# Allegro board AAST_BOARD V1.brd
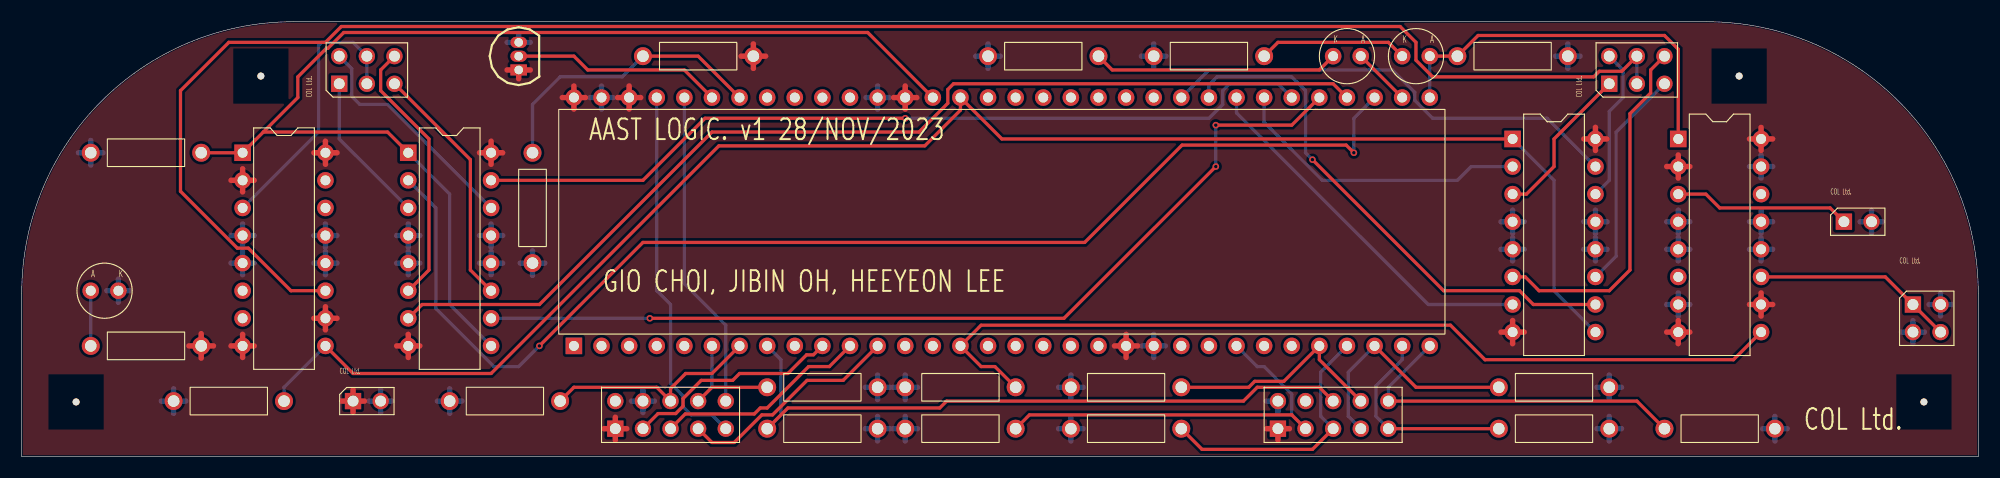
[diagram p0: board, top side]
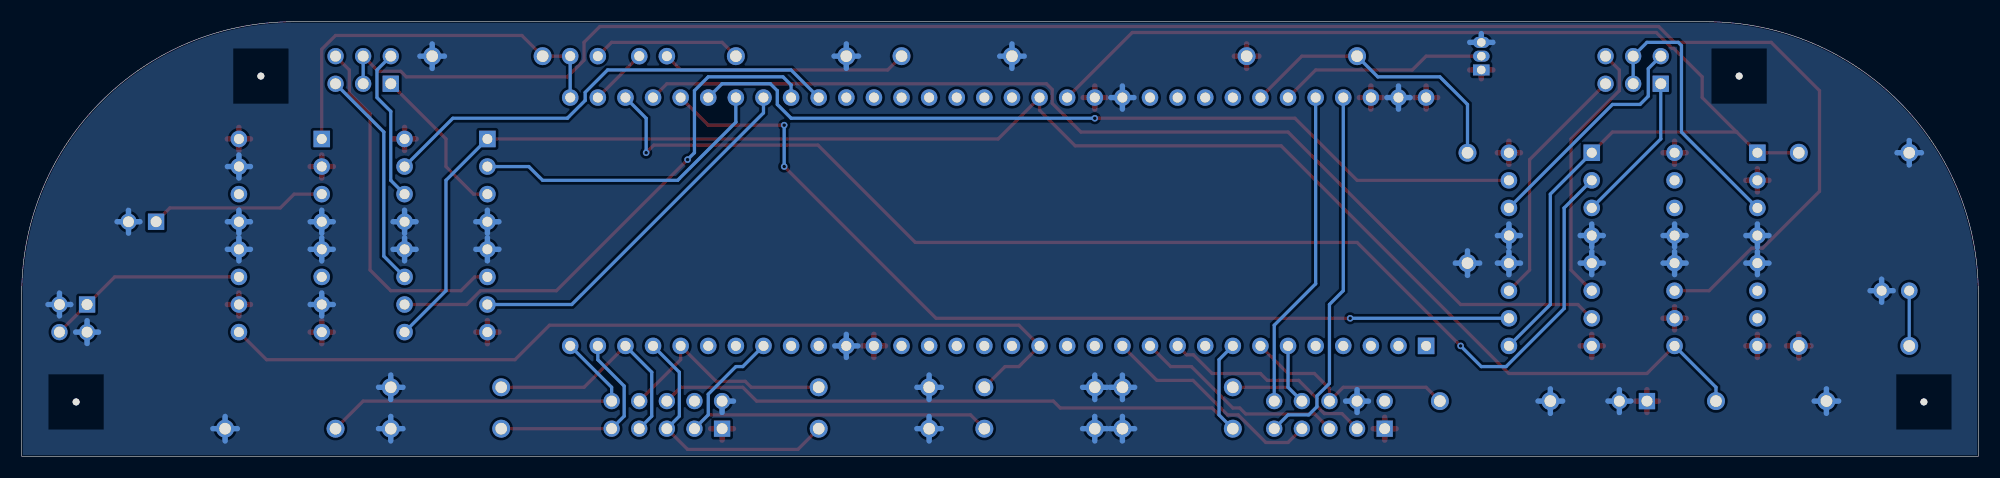
[diagram p1: board, bottom side, seen from below]

Outline 180 x 40 mm; copper layers: TOP, BOTTOM. Coordinates in mm from the lower left corner of the outline.
Outline path: 0,15 0,0 180,0 180,15 arc(172.68,32.68) 155,40 25,40 arc(7.32,32.68) 0,15

## Design rules (mm)
constraint set DEFAULT: min track width 0.3
nets with their own width: min track width 0.5; nets +5V GND

## Placement (name value [footprint] x y rotation side)
D1  LED  [COLLED]  120.65 36.83 270 top
D2  LED  [COLLED]  127 36.83 270 top
D3  LED  [COLLED]  8.89 15.24 90 top
J1  XMOTOR  [COLHEADER6]  31.75 35.56 90 top
J2  R_A_TRANSMIT  [COLHEADER10]  120.65 3.81 90 top
J3  YMOTOR  [COLHEADER6]  148.59 35.56 90 top
J4  CONTROLER_TRANSMIT  [COLHEADER10]  59.69 3.81 90 top
J5  GUN  [COLHEADER2]  168.91 21.59 0 top
J6  FANCON  [COLHEADER4]  175.26 12.7 0 top
J7  POWERCON  [COLHEADER2]  31.75 5.08 0 top
NOREF  -  [unnamed]  22 35 0 top
NOREF#2  -  [unnamed]  5 5 0 top
NOREF#3  -  [unnamed]  158 35 0 top
NOREF#4  -  [#2]  6.48 31.79 0 top
NOREF#5  -  [unnamed]  175 5 0 top
NOREF#6  -  [#2]  0 0 0 top
NOREF#7  -  [#2]  25 40 0 top
NOREF#8  -  [#2]  0 0 90 top
R1  1K  [RES400]  24.13 5.08 90 top
R2  1K  [RES400]  16.51 27.94 90 top
R3  1K  [RES400]  91.44 6.35 90 top
R4  1K  [RES400]  68.58 6.35 270 top
R5  1K  [RES400]  68.58 2.54 270 top
R6  1K  [RES400]  49.53 5.08 90 top
R7  1K  [RES400]  81.28 2.54 270 top
R8  1K  [RES400]  106.68 6.35 90 top
R9  10k  [RES400]  57.15 36.83 270 top
R10  1K  [RES400]  106.68 2.54 90 top
R11  1K  [RES400]  135.89 6.35 270 top
R12  1K  [RES400]  46.99 27.94 180 top
R13  1K  [RES400]  135.89 2.54 270 top
R14  1K  [RES400]  151.13 2.54 270 top
R15  1K  [RES400]  132.08 36.83 270 top
R16  330  [RES400]  114.3 36.83 90 top
R17  330  [RES400]  99.06 36.83 90 top
R18  330  [RES400]  16.51 10.16 90 top
U1  L293D  [DIP16_3]  20.32 27.94 0 top
U2  L293D  [DIP16_3]  35.56 27.94 0 top
U3  ATMEGA128-16AU  [DIP64_9]  50.8 10.16 90 top
U4  L293D  [DIP16_3]  137.16 29.21 0 top
U5  L293D  [DIP16_3]  152.4 29.21 0 top
U6  LM35/SO  [TO92]  45.72 35.56 90 top

## Library data of the parts
D1-D3 = LED: Tolerance: ***; User Part Number: ***
J1 J3 = HEADER 6
J2 J4 = HEADER 10
J5 J7 = HEADER 2
J6 = HEADER 4
R1-R18 = R: Tolerance: ***; User Part Number: ***
U1 U2 U4 U5 = L293D: Tolerance: ***; User Part Number: ***
U3 = ATMEGA128-16AU: Tolerance: ***; User Part Number: ***
U6 = LM35/SO_1

## Footprints (pads in the part's own frame, mm; a bottom-side part is the same pattern mirrored in y, then rotated)
COLHEADER2
  rect 1.5x1.5 hole 1: 1(-1.27,0)
  round 1.5 hole 1: 2(1.27,0)
COLHEADER4
  rect 1.5x1.5 hole 1: 1(-1.27,1.27)
  round 1.5 hole 1: 2(-1.27,-1.27) 3(1.27,-1.27) 4(1.27,1.27)
COLHEADER6
  rect 1.5x1.5 hole 1: 1(-1.27,2.54)
  round 1.5 hole 1: 2(-1.27,0) 3(-1.27,-2.54) 4(1.27,-2.54) 5(1.27,0) 6(1.27,2.54)
COLHEADER10
  rect 1.5x1.5 hole 1: 1(-1.27,5.08)
  round 1.5 hole 1: 2(-1.27,2.54) 3(-1.27,0) 4(-1.27,-2.54) 5(-1.27,-5.08) 6(1.27,-5.08) 7(1.27,-2.54) 8(1.27,0) 9(1.27,2.54) 10(1.27,5.08)
COLLED
  round 1.524 hole 0.914: 1(0,0) 2(0,2.54)
DIP16_3
  rect 1.524x1.524 hole 0.914: 1(0,0)
  round 1.524 hole 0.914: 2(0,-2.54) 3(0,-5.08) 4(0,-7.62) 5(0,-10.16) 6(0,-12.7) 7(0,-15.24) 8(0,-17.78) 9(7.62,-17.78) 10(7.62,-15.24) 11(7.62,-12.7) 12(7.62,-10.16) 13(7.62,-7.62) 14(7.62,-5.08) 15(7.62,-2.54) 16(7.62,0)
DIP64_9
  rect 1.524x1.524 hole 0.914: 1(0,0)
  round 1.524 hole 0.914: 2(0,-2.54) 3(0,-5.08) 4(0,-7.62) 5(0,-10.16) 6(0,-12.7) 7(0,-15.24) 8(0,-17.78) 9(0,-20.32) 10(0,-22.86) 11(0,-25.4) 12(0,-27.94) 13(0,-30.48) 14(0,-33.02) 15(0,-35.56) 16(0,-38.1) 17(0,-40.64) 18(0,-43.18) 19(0,-45.72) 20(0,-48.26) 21(0,-50.8) 22(0,-53.34) 23(0,-55.88) 24(0,-58.42) 25(0,-60.96) 26(0,-63.5) 27(0,-66.04) 28(0,-68.58) 29(0,-71.12) 30(0,-73.66) 31(0,-76.2) 32(0,-78.74) 33(22.86,-78.74) 34(22.86,-76.2) 35(22.86,-73.66) 36(22.86,-71.12) 37(22.86,-68.58) 38(22.86,-66.04) 39(22.86,-63.5) 40(22.86,-60.96) 41(22.86,-58.42) 42(22.86,-55.88) 43(22.86,-53.34) 44(22.86,-50.8) 45(22.86,-48.26) 46(22.86,-45.72) 47(22.86,-43.18) 48(22.86,-40.64) 49(22.86,-38.1) 50(22.86,-35.56) 51(22.86,-33.02) 52(22.86,-30.48) 53(22.86,-27.94) 54(22.86,-25.4) 55(22.86,-22.86) 56(22.86,-20.32) 57(22.86,-17.78) 58(22.86,-15.24) 59(22.86,-12.7) 60(22.86,-10.16) 61(22.86,-7.62) 62(22.86,-5.08) 63(22.86,-2.54) 64(22.86,0)
RES400
  round 1.651 hole 1.067: 1(0,0) 2(0,10.16)
TO92
  rect 1.016x1.524 hole 0.787: 1(0,0)
  oval 1.016x1.524 hole 0.787: 2(1.27,0) 3(2.54,0)
unnamed
  round 0.635 hole 3 unplated: (0,0)

## Nets
+5V: J2.1 J4.1 J7.1 R9.2 R18.1 U1.2 U1.8 U1.10 U1.16(VSS) U2.8 U2.16(VSS) U3.21 U3.52 U3.62 U3.64 U4.8 U4.16(VSS) U5.2 U5.8 U5.10 U5.16(VSS) U6.1(VS+)
GND: D3.1(CATHODE) J2.10 J4.9 J5.2 J6.2 J6.4 J7.2 R1.2 R2.2 R3.2 R4.2 R5.2 R6.2 R7.1 R8.2 R10.2 R11.2 R12.2 R13.2 R14.2 R15.2 R16.2 R17.2 U1.4 U1.5 U1.12 U1.13 U2.4 U2.5 U2.12 U2.13 U3.22 U3.53 U3.63 U4.4 U4.5 U4.12 U4.13 U5.4 U5.5 U5.7 U5.12 U5.13 U5.15 U6.3
#FAN: J6.1 J6.3 U5.11
#GUN_TRIGGER: J5.1 U5.3
#XA: J1.1 U2.3
#XABAR: J1.3 U2.11
#XB: J1.4 U2.6
#XBBAR: J1.6 U2.14
#YA: J3.1 U4.3
#YABAR: J3.3 U4.11
#YB: J3.4 U4.6
#YBBAR: J3.6 U4.14
BUTTON1: J4.7 R4.1 U3.6
BUTTON2: J4.8 R6.1 U3.7
CLK_R_A: J2.2 R7.2 U3.25
CS: J4.2 U3.10
FAN: R3.1 U3.15 U5.9
GUN_TRIGGER: D2.2 R15.1 U3.33 U5.1
GUNSHOT_SIGNAL: J2.8 R5.1 U3.8
MOSI: J4.4 U3.12
OVR_R_A: J2.7 R8.1 U3.28
RX: J4.5 U3.61
RY: J4.6 U3.60
SCK: J4.3 U3.11
X+_R_A: J2.3 R10.1 U3.29
X-_R_A: J2.4 R11.1 U3.30
XA: U2.2 U3.35
XABAR: U2.10 U3.37
XB: U2.7 U3.36
XBBAR: U2.15 U3.38
XMOTOR_COMMON: J1.2 J1.5 U1.3
XMOTOR_ENABLE: R2.1 U1.1 U2.1 U2.9 U3.51
Y+_R_A: J2.5 R13.1 U3.31
Y-_R_A: J2.6 R14.1 U3.32
YA: U3.39 U4.2
YABAR: U3.41 U4.10
YB: U3.40 U4.7
YBBAR: U3.42 U4.15
YMOTOR_COMMON: J3.2 J3.5 U1.11
YMOTOR_ENABLE: R1.1 U1.9 U3.50 U4.1 U4.9
N07111: U3.59 U6.2
N29275: R9.1 R12.1 U3.58
N29722: D3.2 R18.2
N30121: D1.2 U3.34
N30488: D1.1(CATHODE) R17.1
N298271: D2.1(CATHODE) R16.1

Pads without a net: J2 9; J4 10; U1 6 7 14 15; U3 1 2 3 4 5 9 13 14 16 17 18 19 20 23 24 26 27 43 44 45 46 47 48 49 54 55 56 57; U5 6 14

## Via types
v1: diameter 0.61, hole 0.33, TOP to BOTTOM, 7 vias

## Routing (per net, layer and track width the routed paths; a pad name or vN(x,y) marks a point on that pad's centre or on a via; arc(x,y) is an arc through that point)
+5V: length 91.5
  TOP w0.5: U4.16 144.78,30.27 ; U4.16 143.72,29.21 ; U4.16 145.84,29.21 ; U4.16 144.78,28.15 ; U2.16 44.24,27.94 ; U2.16 42.12,27.94 ; U2.16 43.18,26.88 ; U2.16 43.18,29 ; U3.64 51.86,33.02 ; U3.64 50.8,31.96 ; U3.64 49.74,33.02 ; U3.64 50.8,34.08 ; 114.52,2.54 J2.1 ; J2.1 116.62,2.54 ; J2.1 115.57,1.49 ; 100.54,10.16 U3.21 ; U3.21 101.6,9.1 ; U3.21 101.6,11.22 ; U3.21 102.66,10.16 ; U1.2 21.38,25.4 ; U1.2 20.32,26.46 ; U1.2 19.26,25.4 ; U1.2 20.32,24.34 ; U5.8 153.46,11.43 ; U5.8 152.4,12.49 ; U5.8 151.34,11.43 ; U5.8 152.4,10.37 ; 26.88,27.94 U1.16 ; U1.16 27.94,26.88 ; U1.16 29,27.94 ; U1.16 27.94,29 ; R18.1 16.51,11.29 ; R18.1 17.64,10.16 ; R18.1 16.51,9.03 ; R18.1 15.38,10.16 ; 160.02,28.15 U5.16 ; U5.16 161.08,29.21 ; U5.16 160.02,30.27 ; U5.16 158.96,29.21 ; 137.16,10.37 U4.8 ; U4.8 138.22,11.43 ; U4.8 136.1,11.43 ; U4.8 137.16,12.49 ; 54.82,33.02 U3.62 ; U3.62 55.88,34.08 ; U3.62 55.88,31.96 ; U3.62 56.94,33.02 ; 81.28,31.96 U3.52 ; U3.52 80.22,33.02 ; U3.52 82.34,33.02 ; U3.52 81.28,34.08 ; R9.2 68.44,36.83 ; R9.2 66.18,36.83 ; R9.2 67.31,35.7 ; R9.2 67.31,37.96 ; 26.88,12.7 U1.10 ; U1.10 29,12.7 ; U1.10 27.94,13.76 ; U1.10 27.94,11.64 ; 45.72,34.75 U6.1 ; U6.1 44.66,35.56 ; U6.1 46.78,35.56 ; U1.8 21.38,10.16 ; U1.8 20.32,9.1 ; U1.8 20.32,11.22 ; U1.8 19.26,10.16 ; 160.02,12.91 U5.10 ; U5.10 161.08,13.97 ; U5.10 158.96,13.97 ; U5.10 160.02,15.03 ; U5.2 152.4,27.73 ; U5.2 153.46,26.67 ; U5.2 152.4,25.61 ; U5.2 151.34,26.67 ; J4.1 54.61,3.59 ; J4.1 55.66,2.54 ; J4.1 53.56,2.54 ; J4.1 54.61,1.49 ; 34.5,10.16 U2.8 ; U2.8 36.62,10.16 ; U2.8 35.56,11.22 ; U2.8 35.56,9.1 ; J7.1 30.48,6.13 ; J7.1 30.48,4.03 ; J7.1 31.53,5.08 ; J7.1 29.43,5.08
GND: length 191.7
  BOTTOM w0.5: 19.26,17.78 U1.5 ; U1.5 20.32,18.84 ; U1.5 21.38,17.78 ; U1.5 20.32,16.72 ; U3.53 78.74,34.08 ; U3.53 78.74,31.96 ; U3.53 77.68,33.02 ; U3.53 79.8,33.02 ; 43.18,19.26 U2.13 ; U2.13 42.12,20.32 ; U2.13 43.18,21.38 ; U2.13 44.24,20.32 ; 146.05,1.41 R13.2 ; R13.2 146.05,3.67 ; R13.2 144.92,2.54 ; R13.2 147.18,2.54 ; 151.34,21.59 U5.4 ; U5.4 152.4,20.53 ; U5.4 152.4,22.65 ; U5.4 153.46,21.59 ; R16.2 104.14,37.96 ; R16.2 104.14,35.7 ; R16.2 103.01,36.83 ; R16.2 105.27,36.83 ; U2.5 36.62,17.78 ; U2.5 34.5,17.78 ; U2.5 35.56,16.72 ; U2.5 35.56,18.84 ; R1.2 13.97,6.21 ; R1.2 12.84,5.08 ; R1.2 15.1,5.08 ; R1.2 13.97,3.95 ; 81.28,5.22 R3.2 ; R3.2 82.41,6.35 ; R3.2 80.15,6.35 ; R3.2 81.28,7.48 ; U2.12 44.24,17.78 ; U2.12 43.18,18.84 ; U2.12 42.12,17.78 ; U2.12 43.18,16.72 ; R14.2 162.42,2.54 ; R14.2 161.29,1.41 ; R14.2 160.16,2.54 ; R14.2 161.29,3.67 ; 33.02,4.03 J7.2 ; J7.2 34.07,5.08 ; J7.2 31.97,5.08 ; J7.2 33.02,6.13 ; 8.89,14.18 D3.1 ; D3.1 9.95,15.24 ; D3.1 7.83,15.24 ; D3.1 8.89,16.3 ; U5.13 161.08,21.59 ; U5.13 160.02,20.53 ; U5.13 160.02,22.65 ; U5.13 158.96,21.59 ; 143.72,19.05 U4.12 ; U4.12 145.84,19.05 ; U4.12 144.78,17.99 ; U4.12 144.78,20.11 ; U3.63 53.34,34.08 ; U3.63 53.34,31.96 ; U3.63 54.4,33.02 ; U3.63 52.28,33.02 ; 57.15,4.03 J4.9 ; J4.9 58.2,5.08 ; J4.9 56.1,5.08 ; J4.9 57.15,6.13 ; 77.61,6.35 R4.2 ; R4.2 78.74,7.48 ; R4.2 79.87,6.35 ; R4.2 78.74,5.22 ; J6.4 177.58,13.97 ; J6.4 176.53,12.92 ; J6.4 176.53,15.02 ; J6.4 175.48,13.97 ; 137.16,20.53 U4.4 ; U4.4 137.16,22.65 ; U4.4 136.1,21.59 ; U4.4 138.22,21.59 ; U4.13 145.84,21.59 ; U4.13 143.72,21.59 ; U4.13 144.78,22.65 ; U4.13 144.78,20.53 ; 144.92,6.35 R11.2 ; R11.2 146.05,7.48 ; R11.2 146.05,5.22 ; R11.2 147.18,6.35 ; U2.4 36.62,20.32 ; U2.4 35.56,19.26 ; U2.4 34.5,20.32 ; U2.4 35.56,21.38 ; U1.12 27.94,18.84 ; U1.12 26.88,17.78 ; U1.12 29,17.78 ; U1.12 27.94,16.72 ; 137.16,17.99 U4.5 ; U4.5 138.22,19.05 ; U4.5 137.16,20.11 ; U4.5 136.1,19.05 ; J6.2 173.99,12.48 ; J6.2 172.94,11.43 ; J6.2 175.04,11.43 ; J6.2 173.99,10.38 ; U5.7 153.46,13.97 ; U5.7 152.4,12.91 ; U5.7 152.4,15.03 ; U5.7 151.34,13.97 ; 6.35,26.81 R2.2 ; R2.2 7.48,27.94 ; R2.2 6.35,29.07 ; R2.2 5.22,27.94 ; 151.34,19.05 U5.5 ; U5.5 152.4,20.11 ; U5.5 153.46,19.05 ; U5.5 152.4,17.99 ; U5.12 160.02,20.11 ; U5.12 158.96,19.05 ; U5.12 161.08,19.05 ; U5.12 160.02,17.99 ; 115.57,4.03 J2.10 114.52,5.08 ; U3.22 104.14,11.22 ; U3.22 103.08,10.16 ; U3.22 104.14,9.1 ; U3.22 105.2,10.16 ; U5.15 161.08,26.67 ; U5.15 158.96,26.67 ; U5.15 160.02,27.73 ; U5.15 160.02,25.61 ; 77.61,2.54 R5.2 ; R5.2 78.74,3.67 ; R5.2 79.87,2.54 ; R5.2 78.74,1.41 ; J5.2 170.18,22.64 ; J5.2 169.13,21.59 ; J5.2 170.18,20.54 ; J5.2 171.23,21.59 ; U6.3 45.72,38.91 ; U6.3 46.78,38.1 ; U6.3 44.66,38.1 ; 142.24,35.7 R15.2 ; R15.2 142.24,37.96 ; R15.2 141.11,36.83 ; R15.2 143.37,36.83 ; 81.28,1.41 R7.1 ; R7.1 82.41,2.54 ; R7.1 80.15,2.54 ; R7.1 81.28,3.67 ; R8.2 97.65,6.35 ; R8.2 96.52,5.22 ; R8.2 96.52,7.48 ; R8.2 95.39,6.35 ; 19.26,20.32 U1.4 ; U1.4 21.38,20.32 ; U1.4 20.32,19.26 ; U1.4 20.32,21.38 ; R17.2 90.03,36.83 ; R17.2 88.9,37.96 ; R17.2 87.77,36.83 ; R17.2 88.9,35.7 ; 45.86,17.78 R12.2 ; R12.2 46.99,16.65 ; R12.2 48.12,17.78 ; R12.2 46.99,18.91 ; 96.52,1.41 R10.2 ; R10.2 97.65,2.54 ; R10.2 95.39,2.54 ; R10.2 96.52,3.67 ; R6.2 39.37,6.21 ; R6.2 39.37,3.95 ; R6.2 40.5,5.08 ; R6.2 38.24,5.08 ; U1.13 27.94,21.38 ; U1.13 26.88,20.32 ; U1.13 29,20.32 ; U1.13 27.94,19.26
#FAN: length 18.6
  TOP w0.3: U5.11 171.45,16.51 J6.1 J6.3
#GUN_TRIGGER: length 16.3
  TOP w0.3: U5.3 154.94,24.13 156.21,22.86 166.37,22.86 J5.1
#XA: length 14.1
  BOTTOM w0.3: J1.1 29.21,29.21 U2.3
#XABAR: length 22.7
  TOP w0.3: J1.3 41.27,27.3 41.27,17.14 U2.11
#XB: length 24.7
  TOP w0.3: U2.6 37.47,17.14 37.47,29.21 33.02,33.66 33.02,35.56 J1.4
#XBBAR: length 21.2
  BOTTOM w0.3: J1.6 30.36,35.68 30.36,33.14 31.11,32.38 33.66,32.38 U2.14
#YA: length 14.6
  TOP w0.3: U4.3 138.43,24.13 140.97,26.67 140.97,29.21 J3.1
#YABAR: length 20.4
  BOTTOM w0.3: U4.11 146.69,18.41 146.69,29.84 J3.3
#YB: length 33.1
  TOP w0.3: J3.4 149.86,35.56 149.86,33.44 147.96,31.53 147.96,17.14 146.05,15.24 139.59,15.24 138.32,16.51 U4.6
#YBBAR: length 14.3
  BOTTOM w0.3: U4.14 146.05,25.4 146.05,31.75 147.32,33.02 147.32,35.56 J3.6
BUTTON1: length 12.5
  TOP w0.3: J4.7 63.5,6.35 R4.1
  BOTTOM w0.3: U3.6 63.5,6.35 J4.7
BUTTON2: length 20.3
  TOP w0.3: U3.7 63.5,7.62 61.08,7.62 59.69,6.23 J4.8 58.42,6.35 50.8,6.35 R6.1
CLK_R_A: length 38.3
  TOP w0.3: J2.2 116.84,3.81 92.71,3.81 R7.2
  BOTTOM w0.3: U3.25 113.67,8.26 114.3,8.26 116.84,5.71 116.84,3.81 J2.2
CS: length 20.1
  TOP w0.3: J4.2 58.54,3.93 60.17,3.93 60.84,4.6 60.84,5.32 62.51,6.99 65.41,6.99 66.04,7.62 70.48,7.62 72.2,9.34 72.84,9.34 U3.10
FAN: length 83.5
  TOP w0.3: U5.9 157.48,8.89 134.62,8.89 131.44,12.06 88.27,12.06 U3.15 88.27,8.26 89.53,8.26 R3.1
GUN_TRIGGER: length 36.2
  TOP w0.3: D2.2 R15.1 133.99,38.73 151.13,38.73 152.4,37.47 U5.1
  BOTTOM w0.3: D2.2 U3.33
GUNSHOT_SIGNAL: length 62.8
  TOP w0.3: R5.1 70.48,4.45 84.45,4.45 85.09,5.08 112.39,5.08 113.67,6.35 119.38,6.35 J2.8
  BOTTOM w0.3: R5.1 69.85,3.81 69.85,8.89 U3.8
MOSI: length 20.7
  TOP w0.3: J4.4 63.5,1.27 65.55,1.27 68.09,3.81 69.07,3.81 72.25,6.99 75.56,6.99 U3.12
OVR_R_A: length 20.9
  TOP w0.3: J2.7 119.38,8.89 U3.28 116.12,6.9 113.44,6.9 112.89,6.35 R8.1
RX: length 34.2
  BOTTOM w0.3: U3.61 58.42,15.24 59.69,13.97 59.69,6.71 60.84,5.56 60.84,4.56 61.59,3.81 63.5,3.81 J4.5
RY: length 29.5
  BOTTOM w0.3: J4.6 64.77,12.06 60.96,15.88 U3.60
SCK: length 19.7
  TOP w0.3: J4.3 61.05,3.9 67.39,3.9 67.94,4.45 68.58,4.45 72.39,8.26 74.3,8.26 U3.11
X+_R_A: length 24.6
  TOP w0.3: J2.3 118.75,0.64 108.58,0.64 R10.1
  BOTTOM w0.3: J2.3 119.5,3.69 119.5,7.74 U3.29
X-_R_A: length 22.1
  TOP w0.3: R11.1 128.27,6.35 U3.30
  BOTTOM w0.3: U3.30 122.04,7.74 122.04,3.69 J2.4
XA: length 114.1
  TOP w0.3: v1(47.62,10.16) 57.15,19.68 97.79,19.68 106.75,28.64 121.85,28.64 v1(122.56,27.94)
  BOTTOM w0.3: U3.35 122.56,31.11 v1(122.56,27.94) ; v1(47.62,10.16) 45.72,8.26 43.44,8.26 38.1,13.6 38.1,22.86 U2.2
XABAR: length 86.8
  TOP w0.3: U3.37 116.84,30.48 v1(109.86,30.48) ; v1(57.78,12.7) 95.89,12.7 v1(109.86,26.67)
  BOTTOM w0.3: U2.10 v1(57.78,12.7) ; v1(109.86,26.67) v1(109.86,30.48)
XB: length 96.6
  TOP w0.3: U2.7 36.83,13.97 47.62,13.97 63.5,29.84 82.55,29.84 85.2,32.49 85.2,33.76 85.72,34.29 120.65,34.29 U3.36
XBBAR: length 78.6
  TOP w0.3: U2.15 57.15,25.4 62.87,31.11 v1(81.28,31.11)
  BOTTOM w0.3: U3.38 115.57,34.29 111.12,34.29 110.49,33.66 110.49,32.38 109.22,31.11 v1(81.28,31.11)
XMOTOR_COMMON: length 25.5
  BOTTOM w0.3: J1.2 J1.5 30.48,38.1 27.61,38.1 27.3,37.8 27.3,29.84 U1.3
XMOTOR_ENABLE: length 110.6
  TOP w0.3: R2.1 U1.1 22.23,29.84 ; U2.1 33.66,29.84 22.23,29.84 ; 22.23,29.84 25.4,33.02 25.4,34.92 28.02,37.55 28.17,37.55 29.63,39.01 77.83,39.01 U3.51
  BOTTOM w0.3: U2.9 39.37,13.97 39.37,24.13 U2.1
Y+_R_A: length 19.3
  TOP w0.3: J2.5 R13.1
  BOTTOM w0.3: J2.5 124.58,3.69 124.58,6.47 127,8.89 U3.31
Y-_R_A: length 33.1
  TOP w0.3: R14.1 148.59,5.08 J2.6
  BOTTOM w0.3: U3.32 125.73,6.35 J2.6
YA: length 27.9
  BOTTOM w0.3: U4.2 133.35,26.67 132.08,25.4 119.65,25.4 114.3,30.75 U3.39
YABAR: length 49.1
  TOP w0.3: v1(118.75,27.3) 130.81,15.24 137.79,15.24 139.06,13.97 U4.10
  BOTTOM w0.3: U3.41 109.22,34.18 109.96,34.92 116.84,34.92 118.11,33.66 118.11,27.94 v1(118.75,27.3)
YB: length 34.1
  BOTTOM w0.3: U3.40 111.76,31.61 129.4,13.97 U4.7
YBBAR: length 43.3
  BOTTOM w0.3: U3.42 109.22,35.56 126.1,35.56 128.16,33.5 128.16,32.75 129.8,31.11 140.34,31.11 U4.15
YMOTOR_COMMON: length 169
  TOP w0.3: U1.11 24.77,15.24 20.85,19.16 19.84,19.16 14.61,24.39 14.61,33.66 19.05,38.1 27.94,38.1 29.4,39.56 126.81,39.56 128.27,38.1 128.27,36.46 129.8,34.92 144.62,34.92 145.13,35.44 147.2,35.44 J3.5
  BOTTOM w0.3: J3.5 J3.2
YMOTOR_ENABLE: length 150.6
  TOP w0.3: U1.9 30.48,7.62 43.18,7.62 64.14,28.57 83.08,28.57 86.36,31.86 U3.50 90.17,29.21 U4.1
  BOTTOM w0.3: R1.1 24.13,6.35 U1.9 ; U4.9 140.97,15.24 140.97,25.4 U4.1
N07111: length 19.4
  TOP w0.3: U3.59 60.96,35.56 52.07,35.56 50.8,36.83 U6.2
N29275: length 26.9
  TOP w0.3: R9.1 62.23,36.83 U3.58
  BOTTOM w0.3: R9.1 55.24,34.92 49.53,34.92 46.99,32.38 R12.1
N29722: length 5.1
  BOTTOM w0.3: R18.2 D3.2
N30121: length 5.4
  TOP w0.3: D1.2 U3.34
N30488: length 22.6
  TOP w0.3: R17.1 100.33,35.56 119.38,35.56 D1.1
N298271: length 13.8
  TOP w0.3: R16.1 115.57,38.1 125.73,38.1 D2.1

## Copper pours and planes (outline as drawn; the poured copper is in the pictures)
+5V on TOP: 0.1,15 7.39,32.61 25,39.9 155,39.9 172.61,32.61 179.9,15 179.9,0.1 0.1,0.1 ; 11 cut-outs
GND on BOTTOM: 0.1,15 7.39,32.61 25,39.9 155,39.9 172.61,32.61 179.9,15 179.9,0.1 0.1,0.1 ; 3 cut-outs

## Text on the board
Ref Des/Silkscreen Top: A | K | AAST LOGIC. v1 28/NOV/2023 | GIO CHOI, JIBIN OH, HEEYEON LEE | COL Ltd.
COMPVAL_TYPE_TOP: FIGURE | FINISHED_SIZE | 0.3302 | 0.7874 | 0.9144 | 1.0 | 1.0668 | 3.0 | DRILL CHART: TOP to BOTTOM | ALL UNITS ARE IN MILLIMETERS | PLATED | NON-PLATED | QTY | 7 | 3 | 134 | 33 | 36 | 4
